# Altium PCB drive.PcbDoc
Units mm, origin at the board's own origin, x right, y up, seen from the top; angles counter-clockwise.
Board outline 54 x 19 mm, 4 copper layers (Top Layer, Int1 (GND), Int2 (PWR), Bottom Layer), stack 1.369 mm thick; 105 components, 72 nets, 324 pads, 68 vias.
Unrouted connection lines stored in the file: 115.
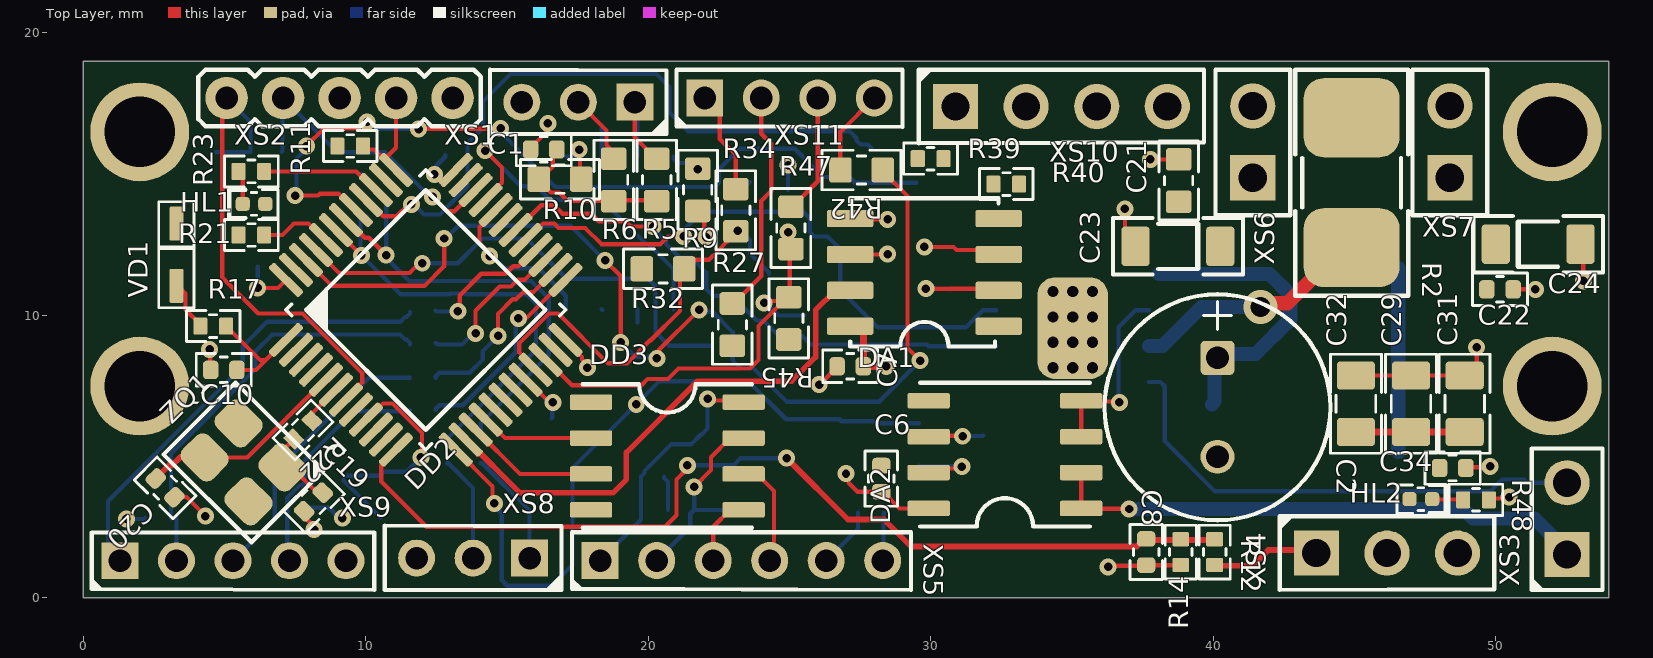
[diagram p0: Top Layer view]
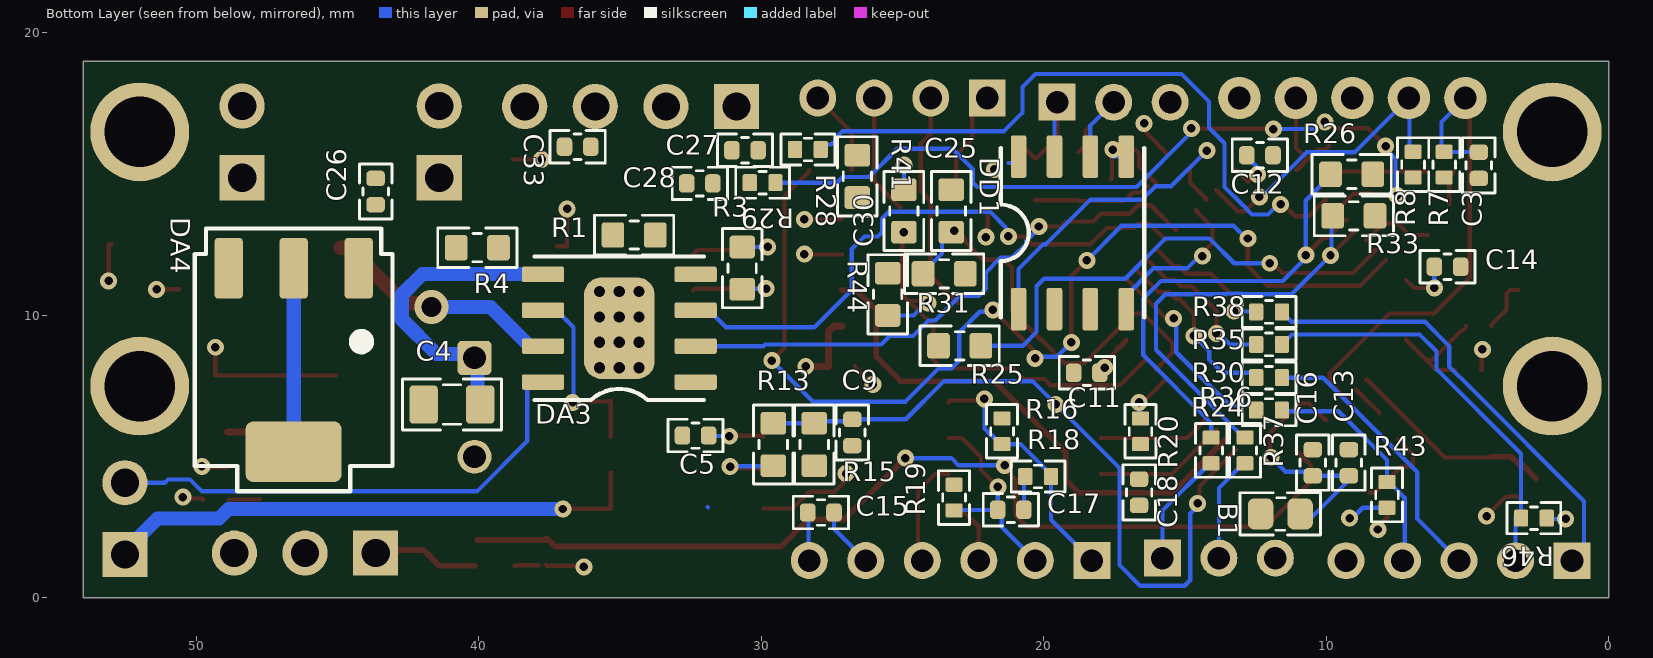
[diagram p1: Bottom Layer view, seen from below]
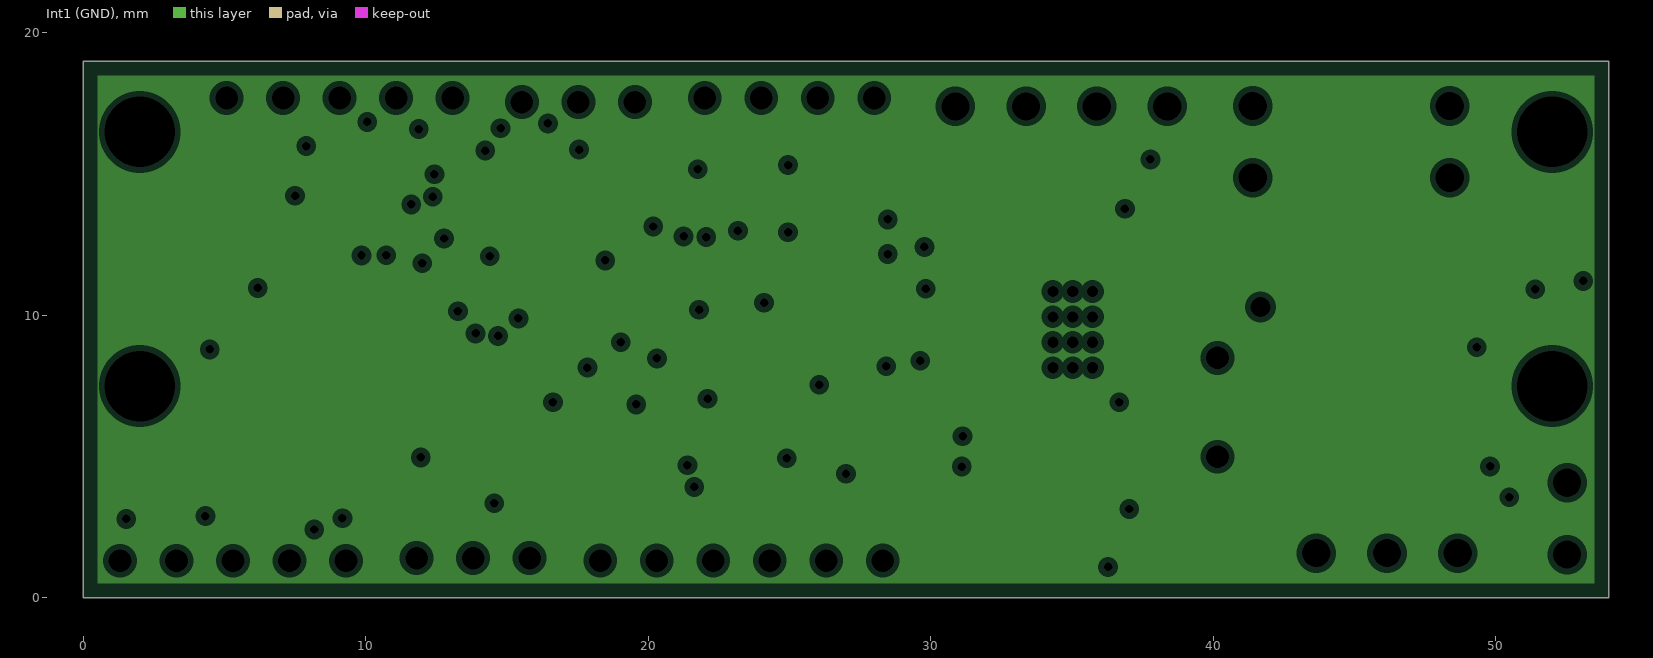
[diagram p2: Int1 (GND), clearances drawn from the general rule]
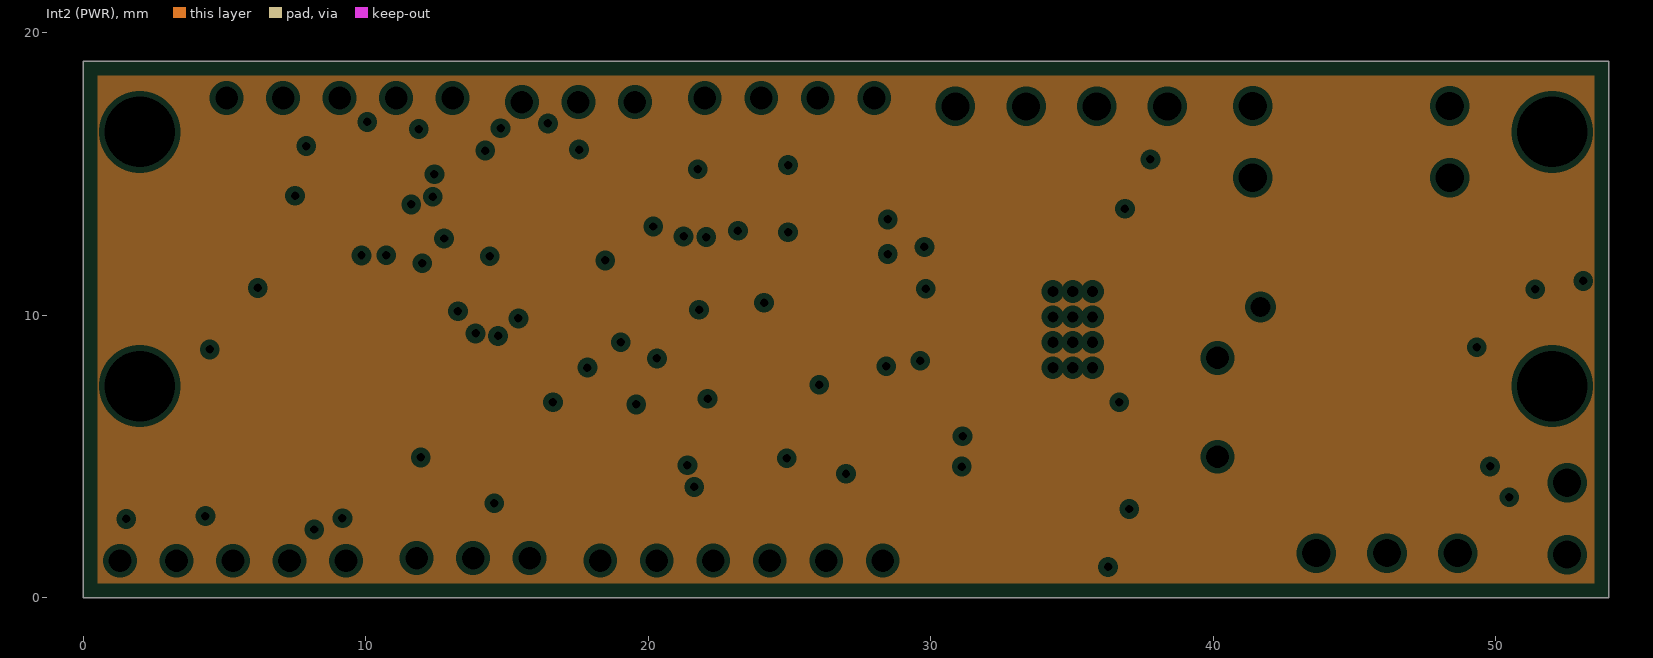
[diagram p3: Int2 (PWR), clearances drawn from the general rule]
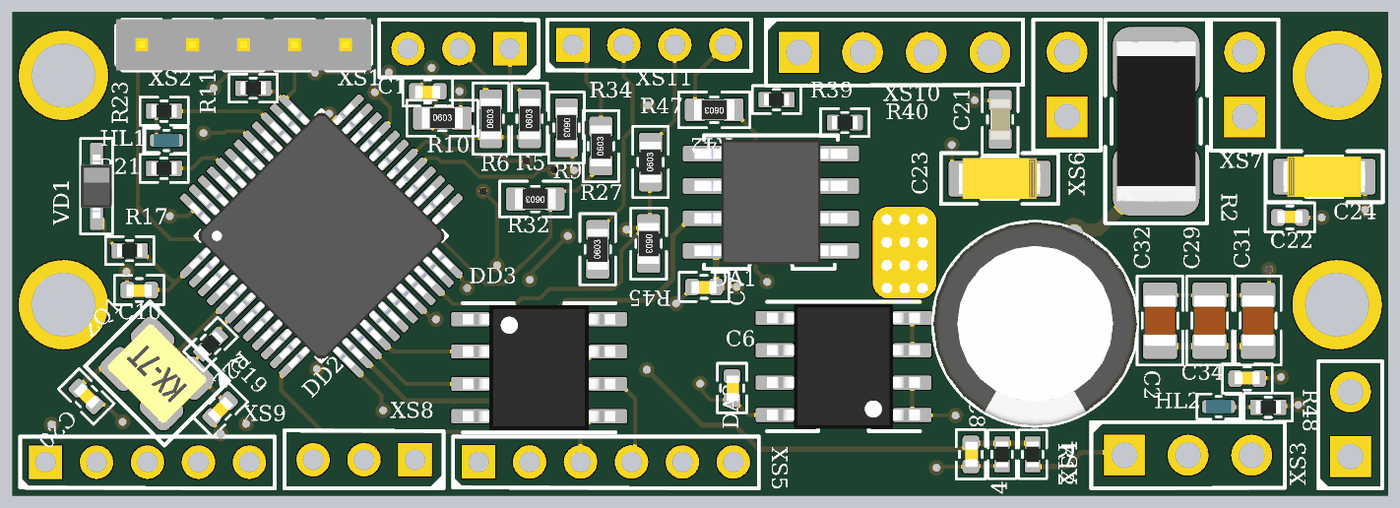
[diagram p4: 3D render of the assembled board from above, using the file's embedded part models]
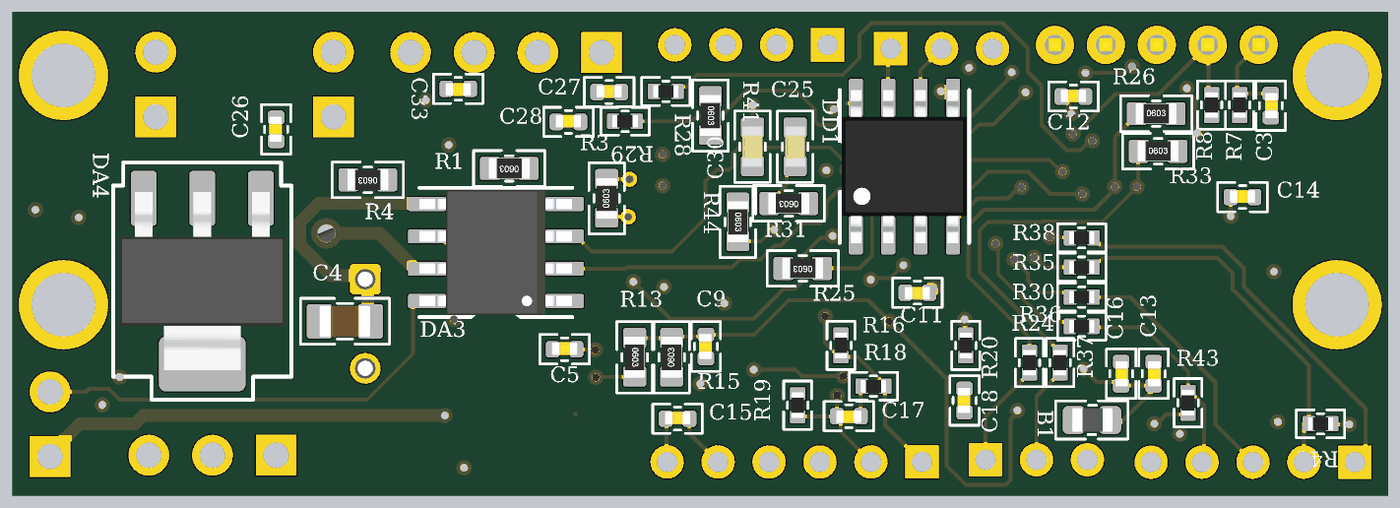
[diagram p5: 3D render of the assembled board from below, using the file's embedded part models]

## Layer stack, top to bottom
Top Solder: solder mask 0.0254, SM-001, Dk 4
Top Layer: signal copper 0.035
Dielectric 1: prepreg 0.1295, PP-017, Dk 4.3
Dielectric 2: prepreg 0.1295, PP-017, Dk 4.3
Int1 (GND): plane copper 0.035
Dielectric 3: core 0.7112, Core-039, Dk 4.8
Int2 (PWR): plane copper 0.035
Dielectric 4: prepreg 0.1295, PP-017, Dk 4.3
Dielectric 5: prepreg 0.1295, PP-017, Dk 4.3
Bottom Layer: signal copper 0.035
Bottom Solder: solder mask 0.0254, SM-001, Dk 4

## Board outline
0,0 54,0 54,19 0,19

## Design rules (kind name [scope] priority, off if disabled: settings)
AcuteAngle [All] p1: minimum=3.50000000000000E+0001 checktracksonly=FALSE
BoardOutlineClearance [All] p1: gap=0.25 ignorepadtopadclearanceinfootprint=FALSE except(0: Arc-SplitContinuation Track-SplitContinuation SMDPad-SplitContinuation THPad-SplitContinuation Via-SplitContinuation Fill-SplitContinuation Poly-SplitContinuation Region-SplitContinuation Text-SplitContinuation)
Clearance Clearance_KeepOutLayer [OnLayer('Keep-Out Layer') vs InNet('No Net')] p1: gap=0.5 ignorepadtopadclearanceinfootprint=FALSE
Clearance [All] p2: gap=0.15 ignorepadtopadclearanceinfootprint=FALSE except(0.2: Arc-Hole Track-Hole SMDPad-Hole THPad-Hole Via-Hole Fill-Hole Poly-Hole Region-Hole Text-Hole)
ComponentClearance [All] p1: gap=0.2 collisioncheckmode=3 verticalgap=0.2 showdistances=FALSE
HoleSize "HoleSize VIA" [IsVia] p1: absolutevalues=TRUE maxlimit=5.9 minlimit=0.3 maxpercent=80.000 minpercent=20.000
HoleSize [IsPad] p2: absolutevalues=TRUE maxlimit=5.9 minlimit=0.6 maxpercent=80.000 minpercent=20.000
HoleToHoleClearance [All] p1: gap=0.25 allowstackedmicrovias=TRUE
MinimumAnnularRing "MinimumAnnularRing VIA" [All] p1: minimumring=0.15
MinimumAnnularRing "MinimumAnnularRing PAD" [IsPAD] p2: minimumring=0.2
MinimumSolderMaskSliver [All] p1: minsoldermaskwidth=0.15
PlaneClearance [All] p1: clearance=0.2
PlaneConnect [All] p1: pad.planeconnectstyle=Relief pad.reliefexpansion=0.2 pad.reliefentries=4 pad.reliefconductorwidth=0.2 pad.reliefairgap=0.2 via.planeconnectstyle=Direct via.reliefexpansion=0.2 via.reliefentries=4 via.reliefconductorwidth=0.2 via.reliefairgap=0.2
PolygonConnect PolygonConnect_Via [IsVia] p1: connectstyle=Direct reliefconductorwidth=0.254 reliefentries=4 polygonreliefangle="90 Angle" airgapwidth=0.254
PolygonConnect [All] p2: thpad.connectstyle=Relief thpad.reliefconductorwidth=0.2 thpad.reliefentries=4 thpad.polygonreliefangle="90 Angle" thpad.airgapwidth=0.2 smdpad.connectstyle=Relief smdpad.reliefconductorwidth=0.2 smdpad.reliefentries=4 smdpad.polygonreliefangle="90 Angle" smdpad.airgapwidth=0.2 via.connectstyle=Direct via.reliefconductorwidth=0.25 via.reliefentries=4 via.polygonreliefangle="90 Angle" via.airgapwidth=0.25
RoutingVias [All] p1: holewidth=0.3 width=0.6 viastyle="Through Hole" minholewidth=0.2 minwidth=0.4 maxholewidth=5.9 maxwidth=6.4
SilkToSilkClearance [All] p1: silktosilkclearance=0
SilkToSolderMaskClearance [IsPad] p1: minsilkscreentomaskgap=0.15 clearancetoexposedcopper=TRUE
SolderMaskExpansion [All] p1: expansion=0.05 istentingtop=FALSE
Width [All] p1: maxlimit=5 minlimit=0.15 preferedwidth=0.2
22 further rules are at their usual default settings.

## Components (designator, comment, footprint, x,y, rotation, side; value= is the part's Value field where it differs from the comment)
B1 "BLM18PG181SN1D" Ferrite_Bead_0603 11.625,2.975 r180 bottom
C1 "4700p" 0402_CAP 16.3,15.875 r180 top
C2 "100x50" "cap pol D8" 40.15,6.75 r270 top
C3 "100n" 0402_CAP 4.6,15.315 r270 bottom
C4 "0.22x50" 0805_cap 40.95,6.85 r0 bottom
C5 "1.0n" 0402_CAP 32.325,5.75 r180 bottom
C6 "0.1u" 0402_CAP 28.25,4.225 r270 top
C7 "0.1u" 0402_CAP 27.15,8.2 r180 top
C8 "100n" 0402_CAP 37.625,1.625 r270 top
C9 "1.0n" 0402_CAP 26.775,5.86 r90 bottom
C10 "2.2u" 0402_CAP 4.975,8.075 r180 top
C11 "0.1u" 0402_CAP 18.475,7.975 r0 bottom
C12 "0.1u" 0402_CAP 12.35,15.675 r180 bottom
C13 "4.7u" 0402_CAP 9.2,4.79 r270 bottom
C14 "0.1u" 0402_CAP 5.71,11.725 r180 bottom
C15 "0.1u" 0402_CAP 27.89,3.025 r180 bottom
C16 "0.1u" 0402_CAP 10.475,4.79 r270 bottom
C17 "1.8n" 0402_CAP 21.165,3.125 r0 bottom
C18 "0.1u" 0402_CAP 16.625,3.74 r90 bottom
C19 "18p" 0402_CAP 8.15,3.4 r225 top
C20 "18p" 0402_CAP 2.9,3.9 r315 top
C21 "100n" 0603_CAP 38.775,14.775 r90 top
C22 "0.1u" 0402_CAP 50.15,10.925 r0 top
C23 "22Ux16V" "CASE A" 38.75,12.45 r180 top
C24 "22Ux16V" "CASE A" 51.5,12.525 r0 top
C25 "100n" 0603_CAP 23.275,13.7 r90 bottom
C26 "0,1" 0402_CAP 43.65,14.385 r90 bottom
C27 "15p" 0402_CAP 30.575,15.85 r180 bottom
C28 "15p" 0402_CAP 32.175,14.675 r180 bottom
C29 "47p" 0805_cap 47,6.875 r90 top
C30 "100n" 0603_CAP 24.95,13.7 r90 bottom
C31 "47p" 0805_cap 48.9,6.875 r90 top
C32 "10p" 0805_cap 45.05,6.875 r90 top
C33 "0.1" 0402_CAP 36.5,15.975 r0 bottom
C34 "0.1" 0402_CAP 48.475,4.6 r0 top
DA1 "INA826AIDR" SO-8? 29.775,11.525 r180 top
DA2 "ACS712-5" SOIC-8 32.625,5.075 r180 top
DA3 "A4950ELJTR-T" SOIC-8-ER 35.025,9.55 r0 bottom
DA4 "1117M3-L-3-3" "SOT-223 (3)" 46.55,8.175 r270 bottom
DD1 "SN65HVD230DR" SOIC-8 18.985,12.925 r90 bottom
DD2 "GD32F303C" LQFP-48 12.125,10.2 r45 top
DD3 "MAX3490EESA" SOIC-8 20.675,5.025 r0 top
HL1 "Зелёный" 0402_LED_GREEN 6.045,13.95 r180 top
HL2 "Зелёный" 0402_LED_GREEN 47.35,3.5 r0 top
R1 "10k" 0603_RES 34.5,12.85 r0 bottom
R2 "0.1" 2512_res 44.9,14.7 r90 top
R3 "12k" 0603_RES 30.675,11.675 r90 bottom
R4 "10k" 0603_RES 40.05,12.4 r0 bottom
R5 "62" 0603_RES 20.3,14.8 r90 top
R6 "62" 0603_RES 18.775,14.8 r90 top
R7 "10k" 0402_res 5.825,15.34 r270 bottom
R8 "10k" 0402_res 6.925,15.34 r270 bottom
R9 "10k" 0603_RES 21.75,14.45 r270 top
R10 "0" 0603_RES 16.875,14.825 r0 top
R11 "10k" 0402_res 9.45,16 r180 top
R12 "5k1" 0402_res 40.05,1.625 r270 top
R13 "18k" 0603_RES 29.575,5.435 r270 bottom
R14 "10k" 0402_res 38.85,1.625 r90 top
R15 "10k" 0603_RES 28.125,5.435 r90 bottom
R16 "4k7" 0402_res 21.475,5.9 r270 bottom
R17 "220" 0402_res 4.6,9.625 r180 top
R18 "120" 0402_res 20.2,4.3 r0 bottom
R19 "4k7" 0402_res 23.175,3.555 r90 bottom
R20 "10k" 0402_res 16.575,5.9 r270 bottom
R21 "10k" 0402_res 5.95,12.85 r180 top
R22 "220" 0402_res 7.775,5.95 r45 top
R23 "470" 0402_res 5.95,15.1 r180 top
R24 "22" 0402_res 12.025,6.65 r0 bottom
R25 "5k1" 0603_RES 22.975,8.925 r0 bottom
R26 "2к" 0603_RES 9.1,15 r180 bottom
R27 "22" 0603_RES 22.975,9.675 r90 top
R28 "1k" 0402_res 28.35,15.875 r0 bottom
R29 "1k" 0402_res 29.95,14.7 r0 bottom
R30 "22" 0402_res 12.025,7.8 r180 bottom
R31 "10k" 0603_RES 23.525,11.475 r0 bottom
R32 "5k1" 0603_RES 20.525,11.65 r180 top
R33 "2к" 0603_RES 9.025,13.525 r180 bottom
R34 "22" 0603_RES 23.1,13.725 r90 top
R35 "22" 0402_res 12.025,8.975 r180 bottom
R36 "22" 0402_res 14.075,5.225 r90 bottom
R37 "22" 0402_res 12.875,5.225 r90 bottom
R38 "22" 0402_res 12.025,10.125 r180 bottom
R39 "10k" 0402_res 29.995,15.55 r0 top
R40 "10k" 0402_res 32.675,14.65 r0 top
R41 "5k1" 0603_RES 26.6,14.925 r270 bottom
R42 "22" 0603_RES 27.55,15.15 r180 top
R43 "5k" 0402_res 7.85,3.65 r270 bottom
R44 "10k" 0603_RES 25.525,10.75 r270 bottom
R45 "5k1" 0603_RES 24.975,9.9 r270 top
R46 "5k" 0402_res 2.65,2.825 r180 bottom
R47 "22" 0603_RES 25.05,13.1 r90 top
R48 "470" 0402_res 49.3,3.475 r180 top
VD1 "BAT60B" SOD-323 3.3,12.15 r270 top
XS1 "CAN" PH3_2mm 17.525,17.55 r180 top
XS2 "SWD" jumper_5pin_step2mm 9.075,17.7 r180 top
XS3 "OUT" step_2.54_2 52.525,1.538 r90 top
XS4 "POT" step_2.5_3pin 43.65,1.59 r0 top
XS5 "SSI" PH6_2mm 21.3,1.325 r0 top
XS6 "power_12v" "STEP_2.54mm 2X1" 41.4,14.875 r180 top
XS7 "power_5v" "STEP_2.54mm 2X1" 48.375,14.875 r180 top
XS8 "I2C or UART" PH3_2mm 13.8,1.413 r180 top
XS9 "SPI" PH5_2mm 4.3,1.319 r0 top
XS10 "ENC" step_2.5_4pin 30.875,17.4 r0 top
XS11 "TTL" PH4_2mm 25,17.7 r0 top
ZQ1 "8MHz" KX-7T 5.675,4.8 r135 top

## Footprints (in the part's own frame and the unit in brackets; to place one, negate y for a bottom-side part, rotate by r counter-clockwise, add the part's x,y. Pads: shape width x height; smd on the part's side, far side on the other; paste and mask are expansions set on the pad)
0402_CAP [mm]
  rrect50% 0.55x0.65 smd: 1(-0.465,0) 2(0.465,0)
  silkscreen extent -0.97,-0.58 0.97,0.58, body extent -0.5,-0.22 0.5,0.28, height 0.5
0402_LED_GREEN [mm]
  rrect50% 0.5x0.5 smd: A(-0.4,0) K(0.4,0)
  silkscreen extent -0.85,-0.5 0.87,0.5, body extent -0.5,-0.25 0.5,0.25, height 0.4
0402_res [mm]
  rrect20% 0.5x0.6 smd: 1(-0.455,0) 2(0.455,0)
  silkscreen extent -0.95,-0.55 0.95,0.55, body extent -0.5,-0.25 0.5,0.25, height 0.35
0603_CAP [mm]
  rrect25% 0.8x0.9 smd: 1(-0.75,0) 2(0.75,0)
  silkscreen extent -1.4,-0.7 1.4,0.7, body extent -0.8,-0.4 0.8,0.4, height 0.8
0603_RES [mm]
  rrect25% 0.8x0.9 smd: 1(-0.75,0) 2(0.75,0)
  silkscreen extent -1.4,-0.7 1.4,0.7, body extent -0.8,-0.41 0.8,0.41, height 0.45
0805_cap [mm]
  rrect25% 1x1.35 smd: 1(-1,0) 2(1,0)
  silkscreen extent -1.75,-0.9 1.75,0.9, body extent -1,-0.63 1,0.63, height 1.45
2512_res [mm]
  rrect50% 2.8x3.4 smd: 1(-2.3,0) 2(2.3,0)
  silkscreen extent -4,-2 4,2, body extent -3.15,-1.55 3.15,1.55, height 0.55
"cap pol D8" [mm]
  rrect25% 1.2x1.2 hole 0.8: 1(-1.75,0)
  round 1.2 hole 0.8: 2(1.75,0)
  silkscreen extent -4,-4 4,4, body extent -4,-4 4,4, height 11.5
"CASE A" [mm]
  rrect25% 1x1.4 smd: 1(-1.5,0) 2(1.5,0)
  silkscreen extent -2.3,-1 2.3,1, body extent -1.6,-0.8 1.6,0.8, height 1.6
Ferrite_Bead_0603 [mm]
  rrect50% 0.9x1.1 smd: 1(-0.7,0) 2(0.7,0)
  silkscreen extent -1.43,-0.75 1.43,0.75, body extent -0.77,-0.48 0.83,0.48, height 0.8
jumper_5pin_step2mm [mm]
  round 1.5 hole 0.8: 1(-4,0) 2(-2,0) 3(0,0) 4(2,0) 5(4,0)
  silkscreen extent -5,-1 5,1, body extent -5,-1 5,1, height 5.21
KX-7T [mm]
  rrect50% 1.5x1.3 smd: 1(-1.1,-0.85) 2(1.1,0.85) GND(-1.1,0.85) GND(1.1,-0.85)
  silkscreen extent -2.2,-1.8 2.2,1.8, body extent -1.61,-1.25 1.61,1.25, height 0.81
LQFP-48 [mm]
  rrect50% 1.5x0.3 smd: 1(-4.25,2.75) 2(-4.25,2.25) 3(-4.25,1.75) 4(-4.25,1.25) 5(-4.25,0.75) 6(-4.25,0.25) 7(-4.25,-0.25) 8(-4.25,-0.75) 9(-4.25,-1.25) 10(-4.25,-1.75) 11(-4.25,-2.25) 12(-4.25,-2.75) 25(4.25,-2.75) 26(4.25,-2.25) 27(4.25,-1.75) 28(4.25,-1.25) 29(4.25,-0.75) 30(4.25,-0.25) 31(4.25,0.25) 32(4.25,0.75) 33(4.25,1.25) 34(4.25,1.75) 35(4.25,2.25) 36(4.25,2.75)
  rrect50% 0.3x1.5 smd: 13(-2.75,-4.25) 14(-2.25,-4.25) 15(-1.75,-4.25) 16(-1.25,-4.25) 17(-0.75,-4.25) 18(-0.25,-4.25) 19(0.25,-4.25) 20(0.75,-4.25) 21(1.25,-4.25) 22(1.75,-4.25) 23(2.25,-4.25) 24(2.75,-4.25) 37(2.75,4.25) 38(2.25,4.25) 39(1.75,4.25) 40(1.25,4.25) 41(0.75,4.25) 42(0.25,4.25) 43(-0.25,4.25) 44(-0.75,4.25) 45(-1.25,4.25) 46(-1.75,4.25) 47(-2.25,4.25) 48(-2.75,4.25)
  silkscreen extent -3.5,-3.5 3.5,3.5, body extent -4.5,-4.5 4.5,4.5, height 1.6
PH3_2mm [mm]
  rect 1.308x1.308 / inner round 1.308 / far side rect 1.308x1.308 hole 0.8: 1(-2,0)
  round 1.308 hole 0.8: 2(0,0) 3(2,0)
  silkscreen extent -3.13,-1.15 3.13,1.13
PH4_2mm [mm]
  rect 1.308x1.308 / inner round 1.308 / far side rect 1.308x1.308 hole 0.8: 1(-3,0)
  round 1.308 hole 0.8: 2(-1,0) 3(1,0) 4(3,0)
  silkscreen extent -4,-1.02 4,1
PH5_2mm [mm]
  rect 1.308x1.308 / inner round 1.308 / far side rect 1.308x1.308 hole 0.8: 1(-3,0)
  round 1.308 hole 0.8: 2(-1,0) 3(1,0) 4(3,0) 5(5,0)
  silkscreen extent -4,-1.03 6,1
PH6_2mm [mm]
  rect 1.308x1.308 / inner round 1.308 / far side rect 1.308x1.308 hole 0.8: 1(-3,0)
  round 1.308 hole 0.8: 2(-1,0) 3(1,0) 4(3,0) 5(5,0) 6(7,0)
  silkscreen extent -4,-1.04 8,1
SO-8? [mm]
  rrect25% 1.65x0.61 smd: 1(-2.63,1.905) 2(-2.63,0.635) 3(-2.63,-0.635) 4(-2.63,-1.905) 5(2.63,-1.905) 6(2.63,-0.635) 7(2.63,0.635) 8(2.63,1.905)
  silkscreen extent -2.63,-2.63 2.63,2.63, body extent -3,-2.45 3,2.45, height 1.75
SOD-323 [mm]
  rrect25% 1.21x0.5 smd: A(1.105,0) K(-1.105,0)
  silkscreen extent -1.88,-0.63 1.88,0.63, body extent -1.25,-0.63 1.25,0.63, height 1.1
SOIC-8 [mm]
  rrect25% 1.5x0.55 smd: 1(-2.7,1.905) 2(-2.7,0.635) 3(-2.7,-0.635) 4(-2.7,-1.905) 5(2.7,-1.905) 6(2.7,-0.635) 7(2.7,0.635) 8(2.7,1.905)
  silkscreen extent -3,-2.54 3,2.54, body extent -3,-2.45 3,2.45, height 1.75
SOIC-8-ER [mm]
  rrect25% 1.5x0.55 smd: 1(-2.7,1.905) 2(-2.7,0.635) 3(-2.7,-0.635) 4(-2.7,-1.905) 5(2.7,-1.905) 6(2.7,-0.635) 7(2.7,0.635) 8(2.7,1.905)
  round 0.4 hole 0.4: 1(-0.7,-1.3) 1(-0.7,-0.4) 1(-0.7,0.5) 1(-0.7,1.4) 1(0,-1.3) 1(0,-0.4) 1(0,0.5) 1(0,1.4) 1(0.7,-1.3) 1(0.7,-0.4) 1(0.7,0.5) 1(0.7,1.4)
  rrect50% 2.5x3.6 all layers, no hole: 1(0,0)
  silkscreen extent -3,-2.54 3,2.54, body extent -3,-2.45 3,2.45, height 1.7
"SOT-223 (3)" [mm]
  rrect25% 2.15x1 smd: 1(-3.5,2.3) 2(-3.5,0) 3(-3.5,-2.3)
  rrect25% 2.15x3.4 smd: 2(3,0)
  silkscreen extent -4.9,-3.5 4.4,3.5, body extent -3.75,-3.25 3.25,3.25, height 1.64
step_2.5_3pin [mm]
  rect 1.6x1.6 hole 1: 1(0,0)
  round 1.6 hole 1: 2(2.5,0) 3(5,0)
  silkscreen extent -1.3,-1.3 6.3,1.3
step_2.5_4pin [mm]
  rect 1.6x1.6 hole 1: 1(0,0)
  round 1.6 hole 1: 2(2.5,0) 3(5,0) 4(7.5,0)
  silkscreen extent -1.3,-1.3 8.8,1.3
step_2.54_2 [mm]
  rect 1.6x1.6 hole 1: 1(0,0)
  round 1.6 hole 1: 2(2.54,0)
  silkscreen extent -1.25,-1.25 3.75,1.25
"STEP_2.54mm 2X1" [mm]
  rect 1.6x1.6 hole 1: 1(0,0)
  round 1.6 hole 1: 2(0,-2.54)
  silkscreen extent -1.33,-3.83 1.33,1.33

## Part data
B1: library part "Ferrite Bead"
C1 C3 C5 C6 C7 C8 C9 C10 C11 C12 C13 C14 C15 C16 C17 C18 C19 C20 C22 C26 C27 C28 C33 C34: library part Capacitor, Case=0402, ValueType=Конденсатор
C2 C23: library part Capacitor_pol, ValueType=Конденсатор
C4 C29 C31 C32: library part Capacitor, Case=0805, ValueType=Конденсатор
C21 C25 C30: library part Capacitor, Case=0603, ValueType=Конденсатор
C24: library part Capacitor_pol, Case=TYPE(A), ValueType=Конденсатор
DA2: library part CurrentSensor_ACS712-5
DA3: ValueDescriptioneter 1=Full-Bridge, ValueManufacturer="Allegro Microsystems", ValueType="ШИМ драйвер двигателей", ComponentLink1Description=chipdip, ComponentLink1URL=https://www.chipdip.ru/product/a4950eljtr-t, NomenclatureNumber=9001130282
DD2: Case=LQFP-48, ValueDescription=Микроконтроллер, ValueManufacturer="Giga Device", ValueManufacturerPartNumber=GD32F303C, ValueType=Микроконтроллер
DD3: ValueManufacturer="Analog Devices", ComponentLink1Description=chipdip, ComponentLink1URL=https://www.chipdip.ru/product0/8002979238?ysclid=m3rd7su6kb974072814, NomenclatureNumber=8002979238
HL1 HL2: library part Led_green, Case=0603, Temp=-40°C...+85°C, ValueDescription=Светодиод, ValueManufacturer=Foryard, ValueManufacturerPartNumber=fyls-0603ugc, ValueType=Светодиод
R1 R3 R4 R5 R6 R9 R10 R12 R13 R14 R15 R25 R26 R31 R32 R33 R41 R44 R45: library part Resistor, Case=0603, ValueType=Резистор
R2: library part Resistor, Case=2512, ValueType=Резистор
R7 R8 R11 R16 R18 R19 R20 R21 R22 R24 R28 R29 R36 R37 R39 R40 R43 R46: library part Resistor, Case=0402, ValueType=Резистор
R17 R23 R30 R35 R38 R48: library part Resistor, Power=0402, ValueType=Резистор
R27 R34 R42 R47: library part Resistor, Power=0603, ValueType=Резистор
VD1: library part DiodeSch_BAT60B, ValueManufacturer="NXP Semiconductors", ValueManufacturerPartNumber=BAT254
XS2: library part swd_JUMPER_5pin
ZQ1: library part Quartz, ValueType="Кварцевый резонатор"
DA1: ComponentLink1Description=chipdip, ComponentLink1URL=https://www.chipdip.ru/product0/8026300979

## Free pads (board coordinates)
  round 3.5 hole 2.5: 0(2,7.5) 0(2,16.5) 0(52,7.5) 0(52,16.5)

## Via types
v1: diameter 0.6, hole 0.3, Top Layer to Bottom Layer, tented top, 65 vias
v2: diameter 0.6, hole 0.3, Top Layer to Bottom Layer, 2 vias
v3: diameter 1.2, hole 0.7, Top Layer to Bottom Layer, tented top, 1 vias

## Nets (pads, with @x,y where several pads share a name; then routed paths per layer and width w, separated by ;. In a path a pad name is that pad's centre, name@x,y a point inside that pad or via, vN(x,y) a via of type N, cw(c..) or ccw(c..) an arc to the next point about the centre after c; other vN are vias at no path point)
3V3: B1.1 C7.1 C11.1 C12.1 C14.1 C18.2 C29.1 C31.1 C32.1 C34.1 DA1.8 DA3.4 DA4.2 DD1.3 DD2.24 DD2.36 DD2.48 DD3.1 HL1.A HL2.A R7.2 R8.2 R11.2 R26.2 R33.2 VD1.A XS2.1 | length 18.7
  Top Layer w0.15: v1(6.175,10.975) 6.89,10.975 DD2.48 ; v1(12.43,14.998) 12.495,14.998 12.747,14.746 12.782,14.746 DD2.36 ; DD2.24@17.4,8.85 17.364,8.85 DD2.24 17.075,9.104 17.652,8.527 17.652,8.445 17.847,8.25 v1(17.847,8.155)
  Top Layer w0.25: DA1.8 27.435,9.62 27.615,9.44 C7.1 v1(28.425,8.2) ; C32.1 C29.1 C31.1
  Bottom Layer w0.15: v1(6.175,10.975) C14.1 ; v1(12.43,14.998) 12.497,15.065 12.497,15.301 12.815,15.618 C12.1 ; v1(17.847,8.155) 17.847,8.138 C11.1 ; DD1.3 DD1.3@18.385,10.19
  Bottom Layer w0.5: DA4.2@46.55,5.175 DA4.2@46.55,11.675
+5V: C6.2 C15.2 C22.1 C24.1 C26.1 C33.1 DA2.8 DA4.3 R16.1 R25.2 R32.2 R39.2 R40.2 R41.2 R43.2 R45.2 R46.2 XS4.2 XS5.5 XS7.1 XS10.3 | length 7.9
  Top Layer w0.15: v1(27,4.4) 27.086,4.314 27.086,4.081 27.407,3.76 28.3,3.76 28.89,3.17 DA2.8
  Bottom Layer w0.15: v1(1.525,2.8) 2.17,2.8 R46.2 ; R43.2 8.71,3.195 9.08,2.825 v1(9.175,2.825) ; XS5.5 27.425,2.45 C15.2 ; 31.885,3.2 31.905,3.22
+12V: C2.1 C4.1 C21.1 C23.1 DA3.5 XS6.1 | length 10.7
  Bottom Layer w0.5: DA3.5@38.075,11.475 41.985,11.475 42.725,10.735 42.725,9.865 41.5,8.64 40.29,8.64 C2.1 40.05,8.4 40.05,6.95 C4.1
AN_ACS: C9.2 DD2.13 R13.1 R15.2 | length 25.8
  Top Layer w0.15: DD2.13 14.483,3.953 14.483,3.417 v1(14.55,3.35)
  Bottom Layer w0.15: v1(14.55,3.35) 14.55,3.255 14.814,2.991 14.814,0.631 15.011,0.434 16.589,0.434 17.321,1.166 17.321,4.596 20.4,7.675 23.534,7.675 24.884,6.325 C9.2 26.845,6.255 28.055,6.255 R15.2 R13.1
  other v1: 19.575,6.85
CLK: DD2.37 R11.1 XS2.2 | length 4.4
  Top Layer w0.15: R11.1@9.905,16.05 R11.1 10.03,15.875 10.304,15.875 10.658,15.521 11.029,15.15 DD2.37 10.693,15.521 10.693,15.556 11.075,15.938 XS2.2
DIO: DD2.34 R8.1 XS2.4 | length 10.7
  Top Layer w0.15: v1(12.368,14.2) 12.877,13.691 13.142,13.691 DD2.34
  Bottom Layer w0.15: R8.1@7.025,15.795 7.05,15.82 7.05,17.675 XS2.4 9,15.775 10.702,15.775 12.277,14.2 v1(12.368,14.2)
ENC_A: DD2.40 R28.1 | length 23.7
  Top Layer w0.15: DD2.40 10.039,14.089 10.616,13.512 11.1,13.512 11.52,13.932 v1(11.614,13.932)
  Bottom Layer w0.15: v1(11.614,13.932) 11.709,13.932 12.066,13.575 12.627,13.575 12.993,13.941 13.602,14.55 13.602,16.096 14.15,16.644 14.15,17.575 15.125,18.55 20.293,18.55 20.752,18.091 20.752,17.18 21.407,16.525 27.126,16.525 27.375,16.276 27.375,16.196 27.521,16.05 27.77,16.05 27.895,15.925 R28.1
ENC_B: DD2.41 R29.1 | length 28.7
  Top Layer w0.15: v1(7.5,14.241) 7.509,14.25 8.318,14.25 8.381,14.312 9.038,14.312 9.615,13.736 DD2.41 ; v1(7.896,15.996) 8.525,16.625 9.73,16.625 9.955,16.85 v1(10.05,16.85) ; v1(11.875,16.6) 11.887,16.612 14.763,16.612 v1(14.775,16.624)
  Bottom Layer w0.15: v1(7.5,14.241) 7.55,14.291 7.55,15.555 7.896,15.901 v1(7.896,15.996) ; v1(10.05,16.85) 10.145,16.85 10.395,16.6 v1(11.875,16.6) ; v1(14.775,16.624) 14.842,16.557 14.842,16.419 16.711,14.55 22.354,14.55 22.5,14.696 22.5,15.175 23.225,15.9 25.188,15.9 26.188,14.9 27.126,14.9 27.326,14.7 R29.1
GND: C1.2 C2.2 C3.2 C4.2 C5.1 C6.1 C7.2 C8.2 C9.1 C10.2 C11.2 C12.2 C13.1 C14.2 C15.1 C16.1 C18.1 C19.2 C20.2 C21.2 C22.2 C23.2 C24.2 C25.2 C26.2 C27.1 C28.1 C29.2 C30.2 C31.2 C32.2 C33.2 C34.2 DA1.5 DA1.6 DA2.5 DA3.1 DA4.1 DD1.2 DD2.8 DD2.23 DD2.35 DD2.47 DD3.4 R1.2 R2.2 R9.2 R14.1 R15.1 R19.2 R20.2 R21.2 R31.1 R44.1 R48.1 XS1.3 XS2.3 XS4.3 XS5.6 XS6.2 XS7.2 XS8.3 XS9.5 XS10.4 | length 26.5
  Top Layer w0.15: C20.2 3.259,3.602 3.47,3.602 3.501,3.571 3.654,3.571 v1(4.325,2.9) ; v1(4.475,8.8) 4.493,8.782 4.493,8.092 C10.2 ; C19.2 7.821,2.874 8.175,2.52 v1(8.175,2.425) ; C1.2@15.63,15.72 16.383,16.473 16.383,16.733 v1(16.45,16.8) ; R9.2@21.983,13.692 21.983,12.842 v1(22.05,12.775) ; v1(26.05,7.55) 26.067,7.55 26.685,8.168 C7.2 ; DA1.6 28.475,12.16 v1(28.475,12.175) ; DA1.5 27.175,13.4 v1(28.475,13.4) ; v1(36.275,1.1) 36.318,1.142 37.583,1.142 C8.2@37.625,1.185 ; v1(36.875,13.775) 36.875,12.45 C23.2 ; v1(37.775,15.525) C21.2 ; C8.2@37.875,1.16 38.69,1.16 38.7,1.17 R14.1@38.737,1.132 ; C32.2 C29.2 C31.2 49.325,7.875 v1(49.325,8.875) ; C34.2 48.969,4.629 49.769,4.629 v1(49.798,4.658) ; R48.1 49.802,3.522 50.428,3.522 v1(50.475,3.568) ; C22.2 v1(51.4,10.925) ; C24.2 53.1,12.525 v1(53.1,11.225)
  Bottom Layer w0.15: DD1.2@19.62,9.75 DD1.2 ; C25.2 23.325,14.45 C25.2@23.6,14.725 ; C30.2 v1(24.95,15.325) ; XS5.6 28.327,1.353 28.327,2.997 C15.1
I2C_SCL/USART_TX: DD2.42 R26.1 R36.2 | length 17.5
  Top Layer w0.15: DD2.42 9.332,13.382 9.964,12.75 10.109,12.75 v1(10.725,12.134)
  Bottom Layer w0.15: R26.1 9.85,14.95 10.725,14.075 10.725,12.039 11.539,11.225 15.855,11.225 16.48,10.6 16.48,8.599 14.075,6.194 R36.2
I2C_SDA/USART_RX: DD2.43 R33.1 R37.2 | length 15.9
  Top Layer w0.15: DD2.43 8.945,13.028 9.848,12.125 v1(9.85,12.125)
  Bottom Layer w0.15: R33.1 9.813,13.487 9.813,13.372 9.813,12.163 v1(9.85,12.125) 11.225,10.75 11.925,10.75 12.98,10.75 13.005,10.775 13.522,10.775 13.547,10.75 15.694,10.75 16.03,10.414 16.03,8.785 12.925,5.68 R37.2 ; R33.1@9.912,13.372 R33.1@10.041,13.5
IN1: DA3.3 DD2.29 | length 20.9
  Top Layer w0.15: DD2.29 15.696,12.675 16.273,13.252 16.675,13.252 16.826,13.1 17.766,13.1 18.341,12.525 20.434,12.525 20.709,12.8 v1(21.25,12.8)
  Bottom Layer w0.15: v1(21.25,12.8) 21.336,12.886 21.336,13.108 21.904,13.675 25.476,13.675 25.725,13.426 25.725,12.946 25.871,12.8 26.351,12.8 26.798,12.353 26.798,10.907 28.121,9.585 31.25,9.585 31.85,10.185 DA3.3
IN2: DA3.2 DD2.30 | length 19.9
  Top Layer w0.15: DD2.30 15.342,13.028 16.214,13.9 16.663,13.9 16.963,13.6 17.974,13.6 18.249,13.325 19.216,13.325 19.391,13.15 v1(20.175,13.15)
  Bottom Layer w0.15: v1(20.175,13.15) 20.175,13.079 20.617,12.637 20.617,12.55 21.116,12.05 21.525,12.05 22.05,11.525 22.05,10.949 22.299,10.7 22.966,10.7 23.841,9.825 24.076,9.825 24.626,9.275 25.45,9.275 25.75,8.975 29.863,8.975 29.923,8.915 DA3.2
INA826OUT: DA1.7 DD2.14 | length 18.9
  Top Layer w0.2: DD2.14 13.575,5.604 15.458,3.72 18.749,3.72 19.225,4.196 19.225,5.15 21.75,7.675 25.075,7.675 25.925,8.525 25.925,10.19 26.625,10.89 DA1.7
M\C\L\R\: C3.1 DD2.7 R7.1 XS2.5 | length 17.4
  Top Layer w0.15: XS2.5 4.92,17.545 4.92,11.346 6.196,10.07 7.765,10.07 9.873,7.962 9.873,7.63 9.297,7.053 DD2.7
  Bottom Layer w0.15: C3.1@4.7,15.78 4.707,15.787 5.917,15.787 5.925,15.795 5.925,16.85 XS2.5
NetB1_2: B1.2 C13.2 C16.2 DD2.9 | length 8.6
  Top Layer w0.15: DD2.9 10.039,6.311 10.616,6.888 10.947,6.888 11.995,5.84 11.995,5.02 v1(11.95,4.975)
  Bottom Layer w0.15: B1.2@10.525,2.85 9.212,4.163 9.212,4.313 C13.2 C16.2 10.617,4.467 11.442,4.467 v1(11.95,4.975)
NetC1_1: C1.1 R5.1 R6.1 R10.1 | length 5.7
  Top Layer w0.15: R10.1@16.013,14.663 16.623,15.273 16.623,15.733 C1.1 ; R10.1@16.322,14.578 16.55,14.35 16.849,14.35 17.149,14.05 18.75,14.05 18.775,14.075 R5.1@20.3,14.075
NetC5_2: C5.2 DA2.6 | length 2
  Top Layer w0.15: DA2.6 29.958,5.743 31.093,5.743 v1@31.125,5.775
  Bottom Layer w0.15: v1(31.125,5.725) 31.138,5.738 31.848,5.738 C5.2
NetC10_1: C10.1 DD2.1 R17.1 | length 4.1
  Top Layer w0.15: R17.1 5.055,9.575 5.18,9.45 5.23,9.45 5.775,8.905 6.254,8.426 6.462,8.426 ; C10.1 6.111,8.075 6.462,8.426 ; DD2.1 6.462,8.426
NetC17_1: C17.1 R18.2 | length 1.2
  Bottom Layer w0.15: R18.2@20.555,4.3 20.555,4.25 20.7,4.105 C17.1
NetC17_2: C17.2 DD3.7 R19.1 XS5.2 | length 7.4
  Top Layer w0.15: v1(21.628,3.932) 22.222,4.527 22.222,4.982 22.9,5.66 DD3.7
  Bottom Layer w0.15: XS5.2 21.488,2.513 21.488,2.983 C17.2 ; v1(21.628,3.932) 21.629,3.931 21.629,3.126 C17.2 ; R19.1 23.162,3.113 21.642,3.113 C17.2
NetC19_1: C19.1 R22.1 ZQ1.1 | length 3.1
  Top Layer w0.15: R22.1 7.453,5.613 6.929,5.088 6.929,4.648 7.358,4.648 8.278,3.729 C19.1
NetC20_1: C20.1 DD2.5 ZQ1.2 | length 7.5
  Top Layer w0.152: ZQ1.2@4.171,5.002 4.198,4.975 5.804,4.975 8.554,7.725 DD2.5
  Top Layer w0.203: C20.1 3.028,4.686 3.137,4.686 3.453,5.002 ZQ1.2@4.171,5.002
NetC27_2: C27.2 R29.2 R39.1 XS10.2
NetC28_2: C28.2 R28.2 R40.1 XS10.1
NetDA1_1: DA1.1 R1.1
NetDA1_2: DA1.2 R3.1 | length 3.5
  Top Layer w0.15: v2(29.825,10.95) 32.345,10.95 DA1.2
  Bottom Layer w0.15: v2(29.825,10.95) 30.65,10.95 R3.1
NetDA1_3: DA1.3 R3.2 | length 3.6
  Top Layer w0.15: v2(29.775,12.425) 30.801,12.425 30.912,12.314 32.251,12.314 DA1.3
  Bottom Layer w0.15: v2(29.775,12.425) R3.2
NetDA1_4: DA1.4 R4.1
NetDA2_1: DA2.1 DA2.2 XS3.1 | length 19.2
  Top Layer w0.15: DA2.2 DA2.1 35.335,3.16 37.015,3.16 v1(37.025,3.15)
  Bottom Layer w0.5: v1(37.025,3.15) 48.857,3.15 49.189,2.818 51.368,2.818 51.975,2.211 51.975,2.088 XS3.1
NetDA2_3: DA2.3 DA2.4 DA3.6 | length 6.6
  Top Layer w0.15: DA2.3 DA2.4 35.352,6.953 36.647,6.953 v1(36.675,6.925)
  Bottom Layer w0.15: v1(36.675,6.925) 36.65,6.95 36.65,9.585 37.25,10.185 DA3.6
NetDA2_7: DA2.7 R13.2 | length 2.8
  Top Layer w0.15: DA2.7 30.068,4.583 31.033,4.583 v1(31.1,4.65)
  Bottom Layer w0.15: R13.2 29.592,4.667 31.083,4.667 v1(31.1,4.65)
NetDA3_7: DA3.7 R2.1 R4.2 | length 8.6
  Top Layer w0.5: v3(41.675,10.3) 41.809,10.434 42.634,10.434 44.6,12.4 R2.1
  Bottom Layer w0.5: DA3.7 38.2,8.915 39.585,10.3 v3(41.675,10.3)
NetDA3_8: DA3.8 XS3.2 | length 17.8
  Bottom Layer w0.15: DA3.8 38.131,7.645 38.281,7.495 38.281,5.561 40.067,3.775 49.798,3.775 50.216,4.193 51.001,4.193 51.117,4.078 XS3.2
NetDD1_5: DD1.5 R10.2 | length 1.6
  Top Layer w0.15: v1(17.55,15.875) 17.588,15.837 17.588,14.863 R10.2
  Bottom Layer w0.15: DD1.5 v1@17.575,15.625
NetDD1_6: DD1.6 R6.2 XS1.2 | length 4.6
  Top Layer w0.15: XS1.2 18.525,16.55 18.525,16.025 R6.2@18.775,15.775
  Bottom Layer w0.15: XS1.2 18.35,16.725 DD1.6
NetDD1_7: DD1.7 R5.2 XS1.1 | length 4.7
  Top Layer w0.15: XS1.1 19.525,16.3 20.25,15.575 20.3,15.575 20.337,15.575 R5.2@20.612,15.85
  Bottom Layer w0.15: XS1.1 19.62,17.455 DD1.7
NetDD1_8: DD1.8 R9.1 | length 0.5
  Top Layer w0.15: v1(21.75,15.175) R9.1
  Bottom Layer w0.15: DD1.8 20.89,15.55 21.04,15.4 21.25,15.4
NetDD2_6: DD2.6 R22.2 | length 1.2
  Top Layer w0.15: R22.2@8.114,6.543 DD2.6
NetDD2_20: DD2.20 R20.1 | length 1.9
  Top Layer w0.15: DD2.20 15.696,7.725 16.429,6.992 16.558,6.992 v1(16.625,6.925)
  Bottom Layer w0.15: R20.1 16.6,6.38 16.6,6.9 v1(16.625,6.925)
NetDD2_39: DD2.39 R23.1 | length 4.2
  Top Layer w0.15: R23.1 9.665,15.1 10.322,14.443 DD2.39
NetDD2_44: DD2.44 R21.1 | length 2.6
  Top Layer w0.15: R21.1 7.053,12.85 7.454,13.252 7.977,13.252 8.554,12.675 DD2.44
NetDD3_5: DD3.5 XS5.3 | length 2.5
  Top Layer w0.15: XS5.3 22.3,2.52 22.9,3.12 DD3.5
NetDD3_6: DD3.6 XS5.4 | length 3.9
  Top Layer w0.15: DD3.6 23.85,4.39 24.45,3.79 24.45,1.475 XS5.4
NetDD3_8: DD3.8 R16.2 R18.1 XS5.1 | length 9
  Top Layer w0.15: v1(22.1,7.05) 22.16,6.99 23.315,6.99 DD3.8
  Bottom Layer w0.15: XS5.1 19.745,2.77 R18.1 19.87,4.425 19.87,4.495 20.82,5.445 R16.2 ; R16.2@21.525,5.445 21.86,5.78 21.88,5.78 22.1,6 v1(22.1,7.05)
NetHL1_K: HL1.K R23.2 | length 1.2
  Top Layer w0.15: R23.2 5.495,15.05 5.645,14.9 HL1.K
NetHL2_K: HL2.K R48.2 | length 1.1
  Top Layer w0.15: HL2.K 47.762,3.487 48.833,3.487 R48.2
NetR12_2: R12.2 XS4.1 | length 3.8
  Top Layer w0.203: R12.2@40.145,1.145 41.395,1.145 41.95,1.7 43.54,1.7 XS4.1
NetR17_2: R17.2 VD1.K | length 1.8
  Top Layer w0.15: 3.2,10.9 3.493,10.9 3.618,10.775 3.618,10.202 4.145,9.675 R17.2
NetR24_1: R24.1 R43.1 XS9.4 | length 8.4
  Bottom Layer w0.15: XS9.4 7.225,1.394 7.225,3.55 7.655,3.98 7.725,3.98 R43.1 7.85,4.888 9.573,6.611 11.531,6.611 R24.1
NetR30_2: R30.2 XS9.3 | length 9.9
  Bottom Layer w0.15: XS9.3 6.775,2.794 6.775,3.592 6.775,4.45 10.125,7.8 R30.2
NetR35_2: R35.2 R46.1 XS9.2 | length 14.6
  Bottom Layer w0.15: R46.1 3.105,5.105 6.1,8.1 6.1,8.735 6.695,9.33 11.215,9.33 11.395,9.15 11.445,9.15 11.57,9.025 R35.2 ; XS9.2 R46.1@3.3,2.87
NetR36_1: R36.1 XS8.1 | length 4.1
  Bottom Layer w0.15: R36.1 14.125,4.77 15.8,3.095 XS8.1
NetR37_1: R37.1 XS8.2 | length 3.8
  Bottom Layer w0.15: R37.1 12.925,4.77 13.8,3.895 XS8.2
NetR38_2: R38.2 XS9.1 | length 16.2
  Bottom Layer w0.15: XS9.1 0.875,1.744 0.875,3.425 4.918,7.468 5.65,8.2 5.65,8.922 6.508,9.78 11.225,9.78 11.395,9.95 11.445,9.95 11.57,10.075 R38.2
pot: C8.1 DD2.12 R12.1 R14.2 | length 34.7
  Top Layer w0.15: DD2.12 11.064,5.215 10.55,4.701 10.55,4.125 12.155,2.52 20.595,2.52 21.003,2.927 21.003,4.191 21.219,4.407 21.219,4.433 21.386,4.6 v1(21.386,4.695)
  Top Layer w0.203: v1(24.9,4.95) 27.075,2.775 28.35,2.775 29.3,1.825 37.291,1.825 37.556,2.09 C8.1 ; C8.1@37.625,2.055 38.7,2.055 R12.1@40.05,2.055
  Bottom Layer w0.15: v1(21.386,4.695) 23.015,4.695 23.27,4.95 v1(24.9,4.95)
RX(CAN): DD1.4 DD2.32 | length 5.8
  Top Layer w0.15: v1(14.389,12.1) 14.389,12.195 14.023,12.56 14.023,13.123 14.6,13.7 DD2.32
  Bottom Layer w0.15: v1(14.389,12.1) 14.483,12.1 14.908,11.675 16.105,11.675 17.08,10.7 DD1.4
SPI_MISO: DD2.27 R35.1 | length 5.6
  Top Layer w0.15: v1(13.889,9.365) 13.889,10.169 14.745,11.025 15.136,11.025 15.38,11.269 15.633,11.269 16.332,11.968 DD2.27
  Bottom Layer w0.15: R35.1@12.48,9.025 12.53,8.975 13.404,8.975 13.794,9.365 v1(13.889,9.365)
SPI_MOSI: DD2.28 R38.1 | length 4.7
  Top Layer w0.15: v1(13.264,10.15) 13.33,10.217 13.33,10.715 14.091,11.475 14.95,11.475 15.22,11.745 15.402,11.745 15.979,12.321 DD2.28
  Bottom Layer w0.15: R38.1@12.48,10.175 12.518,10.138 13.251,10.138 v1(13.264,10.15)
SPI_SCLK: DD2.26 R30.1 | length 6.5
  Top Layer w0.15: v1(14.684,9.276) 14.684,10.059 15.2,10.575 15.323,10.575 15.567,10.819 15.926,10.819 DD2.26
  Bottom Layer w0.15: R30.1 12.48,7.85 12.605,7.975 13.675,7.975 14.146,8.446 14.146,8.738 v1(14.684,9.276)
SPI_SS: DD2.25 R24.2 | length 6.9
  Top Layer w0.15: 15.711,9.932 17.039,11.261 DD2.25
  Bottom Layer w0.15: R24.2 12.48,6.7 12.605,6.825 13.434,6.825 15.309,8.7 15.309,9.683 15.338,9.712 15.338,9.829 v1(15.405,9.896)
SSI_MISO: DD2.16 DD3.2 | length 4
  Top Layer w0.15: DD2.16 14.282,6.311 14.933,5.66 DD3.2
SSI_SCK: DD2.15 DD3.3 | length 4.7
  Top Layer w0.15: DD2.15 15.46,4.39 DD3.3
TTL_A_IN: R34.2 XS11.1 | length 3.7
  Top Layer w0.15: XS11.1 22.529,17.171 22.529,16.246 23.1,15.675 R34.2
TTL_A_IN_GPIO: C25.1 DD2.21 R31.2 R32.1 R34.1 | length 15
  Top Layer w0.15: DD2.21 16.014,8.114 15.437,8.691 15.437,9.022 16.485,10.07 16.816,10.07 18.58,8.305 19.247,8.305 20.047,9.105 20.069,9.105 21.125,10.161 21.125,11.65 21.125,11.7 21.4,11.975 22.15,11.975 22.481,12.306 22.775,12.6 22.775,12.7 23.075,13 v1(23.175,13)
  Bottom Layer w0.15: v1(23.175,13) 23.275,13 C25.1@23.3,12.975 ; C25.1 23.325,12.95 23.6,12.675 23.6,12.2 24.275,11.525 R31.2
TTL_A_OUT: R27.2 XS11.2 | length 8
  Top Layer w0.15: R27.2 23.025,10.425 24,11.4 24,14.051 24.35,14.401 24.35,16.084 24,16.434 XS11.2
TTL_A_OUT_GPIO: DD2.45 R25.1 R27.1 | length 17.4
  Top Layer w0.15: DD2.45@8.271,12.321 DD2.45 9.057,11.5 11.555,11.5 11.905,11.85 v1(12,11.85)
  Bottom Layer w0.15: v1(12,11.85) 13.255,11.85 14.13,12.725 15.691,12.725 17.116,11.3 19.989,11.3 20.255,11.034 20.255,9.416 20.746,8.925 R25.1
TTL_B_IN: R47.2 XS11.3 | length 4.3
  Top Layer w0.15: R47.2 25.1,13.85 26,14.75 XS11.3
TTL_B_IN_GPIO: C30.1 DD2.22 R44.2 R45.1 R47.1 | length 15.7
  Top Layer w0.15: DD2.22 16.403,8.432 17.305,7.53 19.76,7.53 19.98,7.75 20.7,7.75 21.075,8.125 23.6,8.125 23.903,8.428 23.903,9.628 R45.1@24.792,10.517 ; v1(24.1,10.45) 24.167,10.517 R45.1@24.792,10.517 ; v1(24.95,12.95) 25,12.9 25,12.4 R47.1 25.013,12.313 25.013,10.687 R45.1 24.925,10.65 R45.1@24.792,10.517
  Bottom Layer w0.15: v1(24.1,10.45) 24.155,10.45 24.605,10 R44.2
TTL_B_OUT: R42.2 XS11.4 | length 3
  Top Layer w0.15: R42.2 26.8,16.5 XS11.4
TTL_B_OUT_GPIO: DD2.46 R41.1 R42.1 | length 37.6
  Top Layer w0.15: DD2.46 8.8,11.05 12.084,11.05 12.775,11.741 v1(12.775,12.725) ; v1(18.475,11.95) 19.025,11.4 v1(19.025,9.05) ; v1(20.306,8.48) 20.373,8.547 20.373,8.773 v1(21.8,10.2) v1@21.75,10.2 ; R42.1 28.3,15.1 29.175,14.225 29.175,8.85 v1(29.625,8.4)
  Bottom Layer w0.15: v1(12.775,12.725) 12.83,12.725 13.28,13.175 17.25,13.175 v1(18.475,11.95) ; v1(19.025,9.05) 19.537,8.538 20.248,8.538 v1(20.306,8.48) ; v1(21.8,10.2) 21.867,10.133 22.268,10.133 22.988,9.414 22.988,8.411 23.274,8.125 23.72,8.125 24.895,6.95 28.175,6.95 v1(29.625,8.4)
TX(CAN): DD1.1 DD2.33 | length 12.1
  Top Layer w0.15: v1(14.227,15.838) 14.823,15.241 14.823,14.701 14.246,14.124 DD2.33
  Bottom Layer w0.15: v1(14.227,15.838) 15.49,14.575 16.049,14.575 16.524,14.1 18.341,14.1 19.916,12.525 20.005,12.525 20.89,11.64 DD1.1
pads on no net: DD2.2 DD2.3 DD2.4 DD2.10 DD2.11 DD2.17 DD2.18 DD2.19 DD2.31 DD2.38 ZQ1.GND

## Polygon pours and split planes (outlines as drawn)
no net on Int1 (GND) (split plane): 53.49,0.51 0.51,0.51 0.51,18.49 53.49,18.49
no net on Int2 (PWR) (split plane): 53.49,0.51 0.51,0.51 0.51,18.49 53.49,18.49

## Silkscreen, mask and mechanical layers (free items; w line width, h text height)
Mechanical 1:
  lines w0.15: 0,0.075 54,0.075 54,19 0,19 0,0.075